# EAGLE board Motorsteuerung (EAGLE 9.5.1)
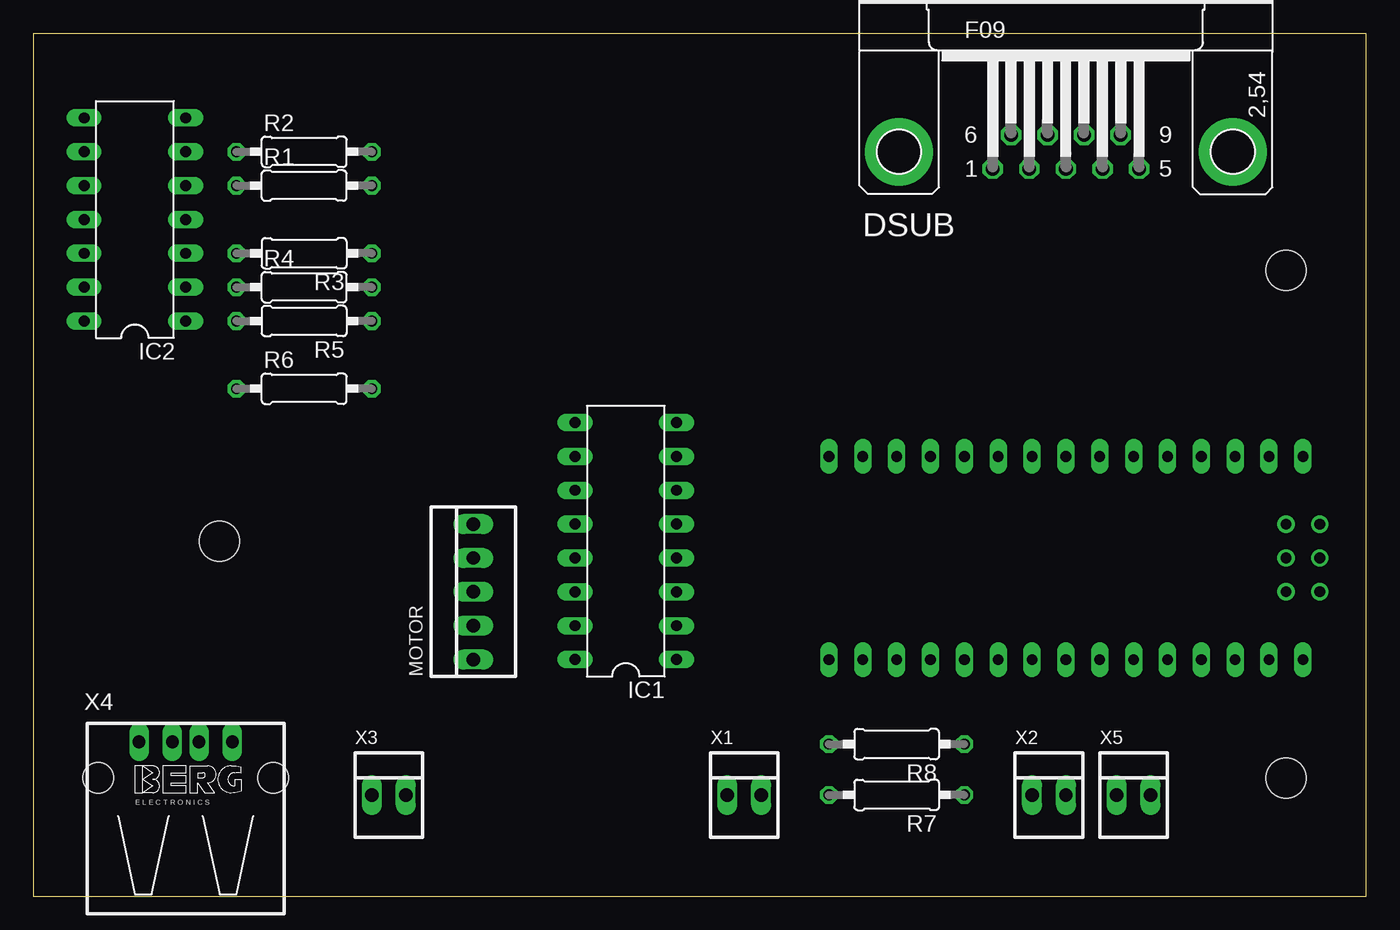
[diagram p0: board, top side]
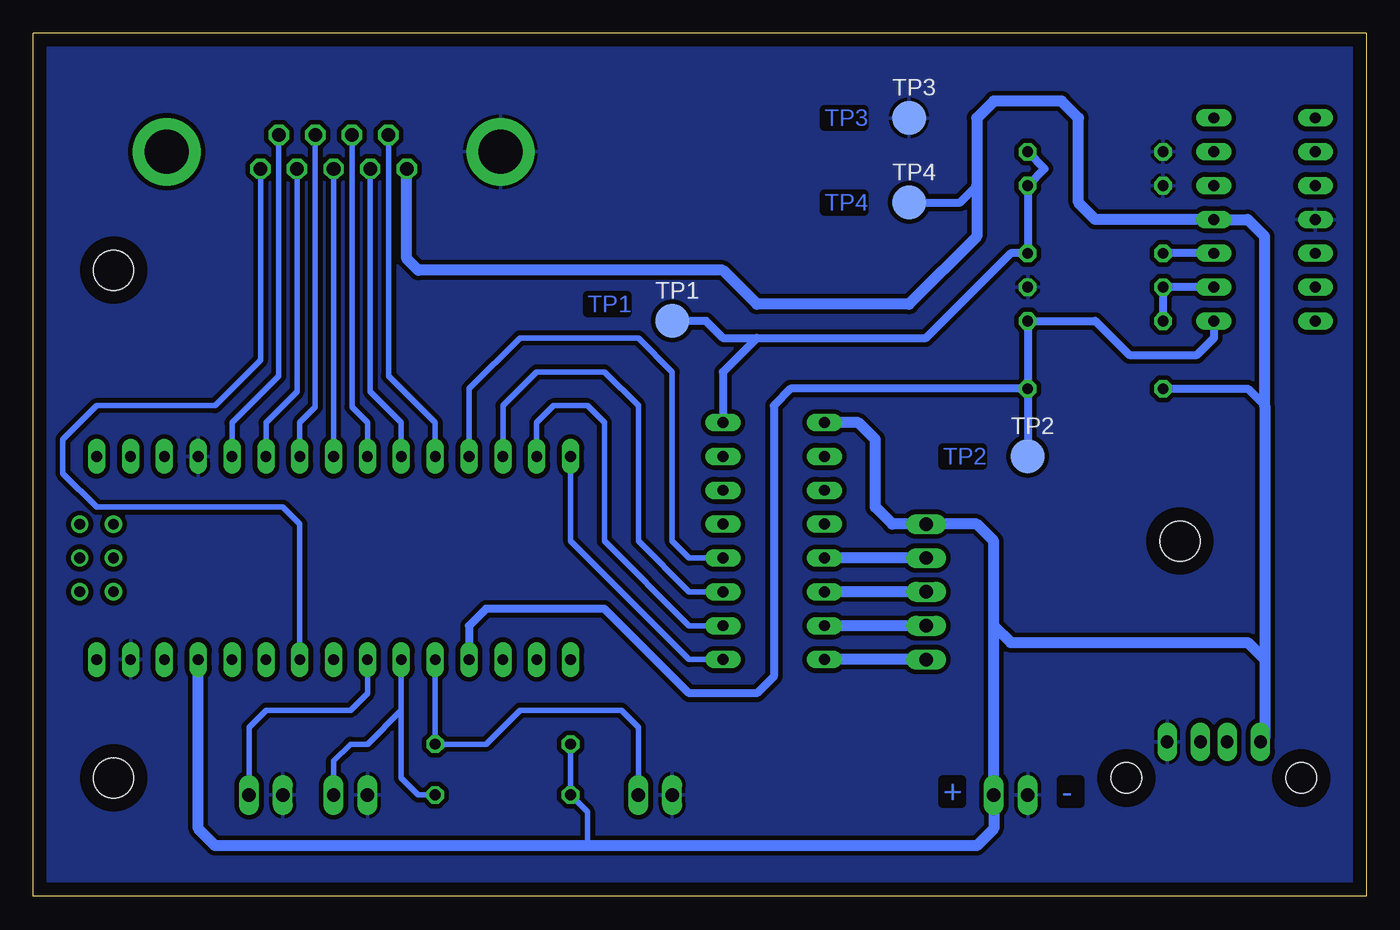
[diagram p1: board, bottom side, seen from below]

Size 100 x 64.77 mm. Coordinates in mm from the lower left corner, seen from the top.
Outline: 100,64.76 100,0 0,0 0,64.76
Outline: 0,64.77 100,64.77
Copper layers (1*16): Top 0.035mm / dielectric 1.5mm / Bottom 0.035mm
Design rules "default *": minimum track width 6mil, minimum drill 0.35mm, track to track 6mil, track to pad 6mil, pad to pad 6mil, via to via 6mil, smd to smd 6mil, copper to edge 40mil, drill to drill 6mil, minimum pad ring 10mil, minimum via ring 8mil, stop-mask expansion 4mil, vias tented up to drill 0mil, thermal gap 10mil
Holes 3 mm at 13.97,26.67 93.98,8.89 93.98,46.99

## Footprints (pad centres in the part's own frame; a part is rotated, then mirrored left to right if it is on the bottom)
F09HP = drill 1.016 octagon: 1 -5.486,-1.27; 2 -2.743,-1.27; 3 0,-1.27; 4 2.743,-1.27; 5 5.486,-1.27; 6 -4.115,1.27; 7 -1.372,1.27; 8 1.372,1.27; 9 4.115,1.27 | drill 3.302 pad 5.08: G1 -12.522,0; G2 12.522,0
DIL16 = drill 0.813 long: 1 -8.89,-3.81; 2 -6.35,-3.81; 3 -3.81,-3.81; 4 -1.27,-3.81; 5 1.27,-3.81; 6 3.81,-3.81; 7 6.35,-3.81; 8 8.89,-3.81; 9 8.89,3.81; 10 6.35,3.81; 11 3.81,3.81; 12 1.27,3.81; 13 -1.27,3.81; 14 -3.81,3.81; 15 -6.35,3.81; 16 -8.89,3.81
DIL14 = drill 0.813 long: 1 -7.62,-3.81; 2 -5.08,-3.81; 3 -2.54,-3.81; 4 0,-3.81; 5 2.54,-3.81; 6 5.08,-3.81; 7 7.62,-3.81; 8 7.62,3.81; 9 5.08,3.81; 10 2.54,3.81; 11 0,3.81; 12 -2.54,3.81; 13 -5.08,3.81; 14 -7.62,3.81
22-23-2051 = drill 1 long: 1 -5.08,0; 2 -2.54,0; 3 0,0; 4 2.54,0; 5 5.08,0
0207/10 = drill 0.813 octagon: 1 -5.08,0; 2 5.08,0
B2,54 = smd 2.54 x 2.54: TP 0,0
NANO = drill 0.8 long: 3.3V -10.16,24.13; 5V -10.16,-1.27; A0 -10.16,19.05; A1 -10.16,16.51; A2 -10.16,13.97; A3 -10.16,11.43; A4 -10.16,8.89; A5 -10.16,6.35; A6 -10.16,3.81; A7 -10.16,1.27; AREF -10.16,21.59; D2 5.08,1.27; D3 5.08,3.81; D4 5.08,6.35; D5 5.08,8.89; D6 5.08,11.43; D7 5.08,13.97; D8 5.08,16.51; D9 5.08,19.05; D10 5.08,21.59; D11 5.08,24.13; D12 5.08,26.67; D13 -10.16,26.67; GND -10.16,-6.35; GND1 5.08,-1.27; RAW -10.16,-8.89; RST -10.16,-3.81; RST1 5.08,-3.81; RX1 5.08,-6.35; TX0 5.08,-8.89 | drill 0.8: ICSP1 -5.08,-10.16; ICSP2 -5.08,-7.62; ICSP3 -2.54,-10.16; ICSP4 -2.54,-7.62; ICSP5 0,-10.16; ICSP6 0,-7.62
22-23-2021 = drill 1 long: 1 -1.27,0; 2 1.27,0
PN87520 = drill 0.95 long: 1 -3.5,2.71; 2 -1,2.71; 3 1,2.71; 4 3.5,2.71 | hole 2.3: -6.57,0; 6.57,0

## Placement (x,y rotation side)
DSUB  [F09HP]  77.47,55.88 0 top
IC1  ULN2003AN  [DIL16]  44.45,26.67 90 top
IC2  LM324P  [DIL14]  7.62,50.8 90 top
MOTOR  22-23-2051  [22-23-2051]  33.02,22.86 90 top
R1  6R2  [0207/10]  20.32,53.34 0 top
R2  6R2  [0207/10]  20.32,55.88 0 top
R3  4K7  [0207/10]  20.32,48.26 180 top
R4  4K7  [0207/10]  20.32,45.72 0 top
R5  33k  [0207/10]  20.32,43.18 180 top
R6  4K7  [0207/10]  20.32,38.1 0 top
R7  4K7  [0207/10]  64.77,7.62 180 top
R8  4K7  [0207/10]  64.77,11.43 180 top
TP1  TPB2,54  [B2,54]  52.07,43.18 0 bottom
TP2  TPB2,54  [B2,54]  25.4,33.02 0 bottom
TP3  TPB2,54  [B2,54]  34.29,58.42 0 bottom
TP4  TPB2,54  [B2,54]  34.29,52.07 0 bottom
U$1  NANO  [NANO]  86.36,27.94 90 top
X1  22-23-2021  [22-23-2021]  53.34,7.62 0 top
X2  22-23-2021  [22-23-2021]  76.2,7.62 0 top
X3  22-23-2021  [22-23-2021]  26.67,7.62 0 top
X4  [PN87520]  11.43,8.89 0 top
X5  22-23-2021  [22-23-2021]  82.55,7.62 0 top

## Library data of the parts
DSUB = con-subd; OC_FARNELL: unknown; OC_NEWARK: unknown
IC1 = uln-udn
IC2 = lm324
MOTOR = con-molex; MF: MOLEX; MPN: 22-23-2051; OC_FARNELL: 1462952; OC_NEWARK: 38C9178
R1-R8 = rcl; SPICEPREFIX: R
TP1-TP4 = testpad
U$1 = Arduino-clone
X1-X3 X5 = con-molex; MF: MOLEX; MPN: 22-23-2021; OC_FARNELL: 1462926; OC_NEWARK: 25C3832
X4 = con-berg; OC_FARNELL: unknown; OC_NEWARK: unknown

## Nets
GND: DSUB.G1 IC2.11 R1.1 R2.1 R4.2 TP3.TP U$1.GND U$1.GND1 X1.1 X2.1 X3.1 X4.4 X5.1
N$1: IC1.16 MOTOR.1
N$2: IC1.1 U$1.D12
N$3: IC1.2 U$1.D11
N$4: IC1.3 U$1.D10
N$5: IC1.4 U$1.D9
N$6: IC1.15 MOTOR.2
N$7: IC1.14 MOTOR.3
N$8: IC1.13 MOTOR.4
N$9: IC1.8 R1.2 R2.2 R3.1 TP1.TP
N$10: DSUB.2 U$1.D7
N$11: DSUB.7 U$1.D6
N$12: DSUB.3 U$1.D5
N$13: DSUB.8 U$1.D4
N$14: DSUB.4 U$1.D3
N$15: DSUB.9 U$1.D2
N$16: DSUB.6 U$1.D8
N$17: IC2.3 R3.2
N$18: IC2.1 R5.1 R6.2 TP2.TP U$1.A0
N$19: IC2.2 R4.1 R5.2
N$20: DSUB.5 U$1.A5
N$21: R8.1 U$1.A1 X1.2
N$22: R7.1 U$1.A2 X2.2
N$24: U$1.A3 X5.2
VCC: DSUB.1 IC1.9 IC2.4 MOTOR.5 R6.1 R7.2 R8.2 TP4.TP U$1.5V X3.2 X4.1

## Tracks (layer width: path | path; a pad name or v marks a point on that pad's centre or on a via)
GND
  pour Bottom (isolate 0.35): 0,67.31 100.33,67.31 100.33,-2.54 0,-2.54
N$1
  Bottom 0.813: MOTOR.1 IC1.16
N$2
  Bottom 0.406: IC1.1 50.8,17.78 59.69,26.67 U$1.D12
N$3
  Bottom 0.406: IC1.2 50.8,20.32 57.15,26.67 57.15,35.56 58.42,36.83 60.96,36.83 62.23,35.56 U$1.D11
N$4
  Bottom 0.406: IC1.3 50.8,22.86 54.61,26.67 54.61,36.83 57.15,39.37 62.23,39.37 64.77,36.83 U$1.D10
N$5
  Bottom 0.406: IC1.4 50.8,25.4 52.07,26.67 52.07,39.37 54.61,41.91 63.5,41.91 67.31,38.1 U$1.D9
N$6
  Bottom 0.813: MOTOR.2 IC1.15
N$7
  Bottom 0.813: MOTOR.3 IC1.14
N$8
  Bottom 0.813: MOTOR.4 IC1.13
N$9
  Bottom 0.61: R2.2 24.13,54.61 R1.2 R3.1 26.67,48.26 33.02,41.91 45.72,41.91 | 45.72,41.91 48.26,39.37 IC1.8 | TP1.TP 49.53,43.18 48.26,41.91 45.72,41.91
N$10
  Bottom 0.406: DSUB.2 74.73,37.9 72.39,35.56 U$1.D7
N$11
  Bottom 0.406: DSUB.7 76.1,36.73 74.93,35.56 U$1.D6
N$12
  Bottom 0.406: U$1.D5 DSUB.3
N$13
  Bottom 0.406: DSUB.8 78.84,36.73 80.01,35.56 U$1.D4
N$14
  Bottom 0.406: DSUB.4 80.21,37.9 82.55,35.56 U$1.D3
N$15
  Bottom 0.406: DSUB.9 81.58,39.06 85.09,35.56 U$1.D2
N$16
  Bottom 0.406: DSUB.6 73.36,39.06 69.85,35.56 U$1.D8
N$17
  Bottom 0.61: IC2.3 R3.2
N$18
  Bottom 0.61: IC2.1 11.43,41.91 12.7,40.64 17.78,40.64 20.32,43.18 R5.1 R6.2 | R6.2 43.18,38.1 44.45,36.83 44.45,16.51 45.72,15.24 50.8,15.24 57.15,21.59 66.04,21.59 67.31,20.32 U$1.A0 | R6.2 TP2.TP
N$19
  Bottom 0.61: IC2.2 R4.1 R5.2
N$20
  Bottom 0.406: DSUB.5 82.96,40.23 86.36,36.83 95.25,36.83 97.79,34.29 97.79,31.75 95.25,29.21 81.28,29.21 80.01,27.94 U$1.A5
N$21
  Bottom 0.406: U$1.A1 R8.1 66.04,11.43 63.5,13.97 55.88,13.97 54.61,12.7 X1.2
N$22
  Bottom 0.406: U$1.A2 72.39,13.97 | 72.39,13.97 72.39,8.89 71.12,7.62 R7.1 | X2.2 77.47,10.16 76.2,11.43 74.93,11.43 72.39,13.97
N$24
  Bottom 0.406: U$1.A3 74.93,15.24 76.2,13.97 82.55,13.97 83.82,12.7 X5.2
VCC
  Bottom 0.406: 58.42,3.81 58.42,6.35 R7.2 R8.2
  Bottom 0.61: R6.1 8.89,38.1 7.62,36.83 | TP4.TP 30.48,52.07 29.21,53.34
  Bottom 0.813: 27.94,20.32 X3.2 27.94,5.08 29.21,3.81 58.42,3.81 86.36,3.81 87.63,5.08 U$1.5V | 27.94,20.32 27.94,26.67 29.21,27.94 MOTOR.5 35.56,27.94 36.83,29.21 36.83,34.29 38.1,35.56 IC1.9 | DSUB.1 71.98,47.85 71.12,46.99 48.26,46.99 45.72,44.45 34.29,44.45 29.21,49.53 29.21,53.34 29.21,58.42 27.94,59.69 22.86,59.69 21.59,58.42 21.59,52.07 20.32,50.8 IC2.4 8.89,50.8 7.62,49.53 7.62,36.83 7.62,17.78 | 27.94,20.32 26.67,19.05 8.89,19.05 7.62,17.78 | X4.1 7.62,11.91 7.62,17.78

## Text on the board
Bottom: TP3 | TP4 | TP1 | TP2 | - | +